# Altium PCB DS145-1.0-B溶解二氧化碳传感器.PcbDoc
Units mm, origin at the board's own origin, x right, y up, seen from the top; angles counter-clockwise.
Board outline 41 x 64 mm, 2 copper layers (Top Layer, Bottom Layer); 21 components, 28 nets, 82 pads, 84 vias.
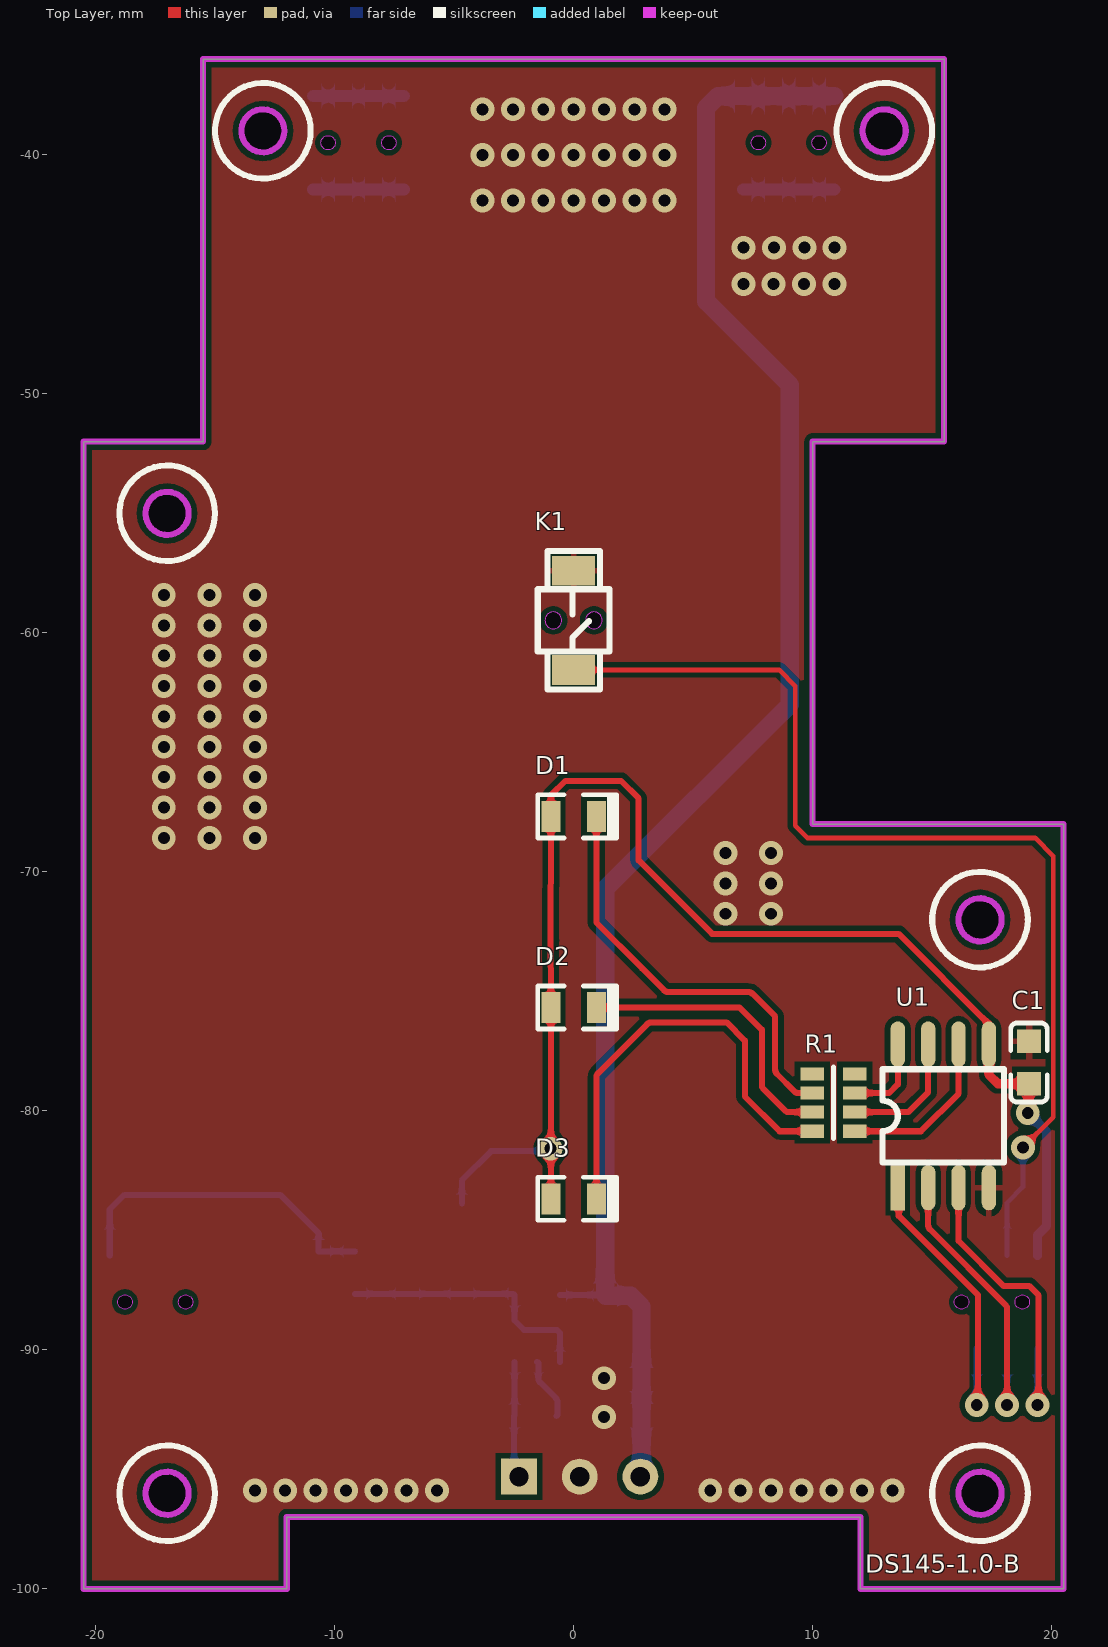
[diagram p0: Top Layer view]
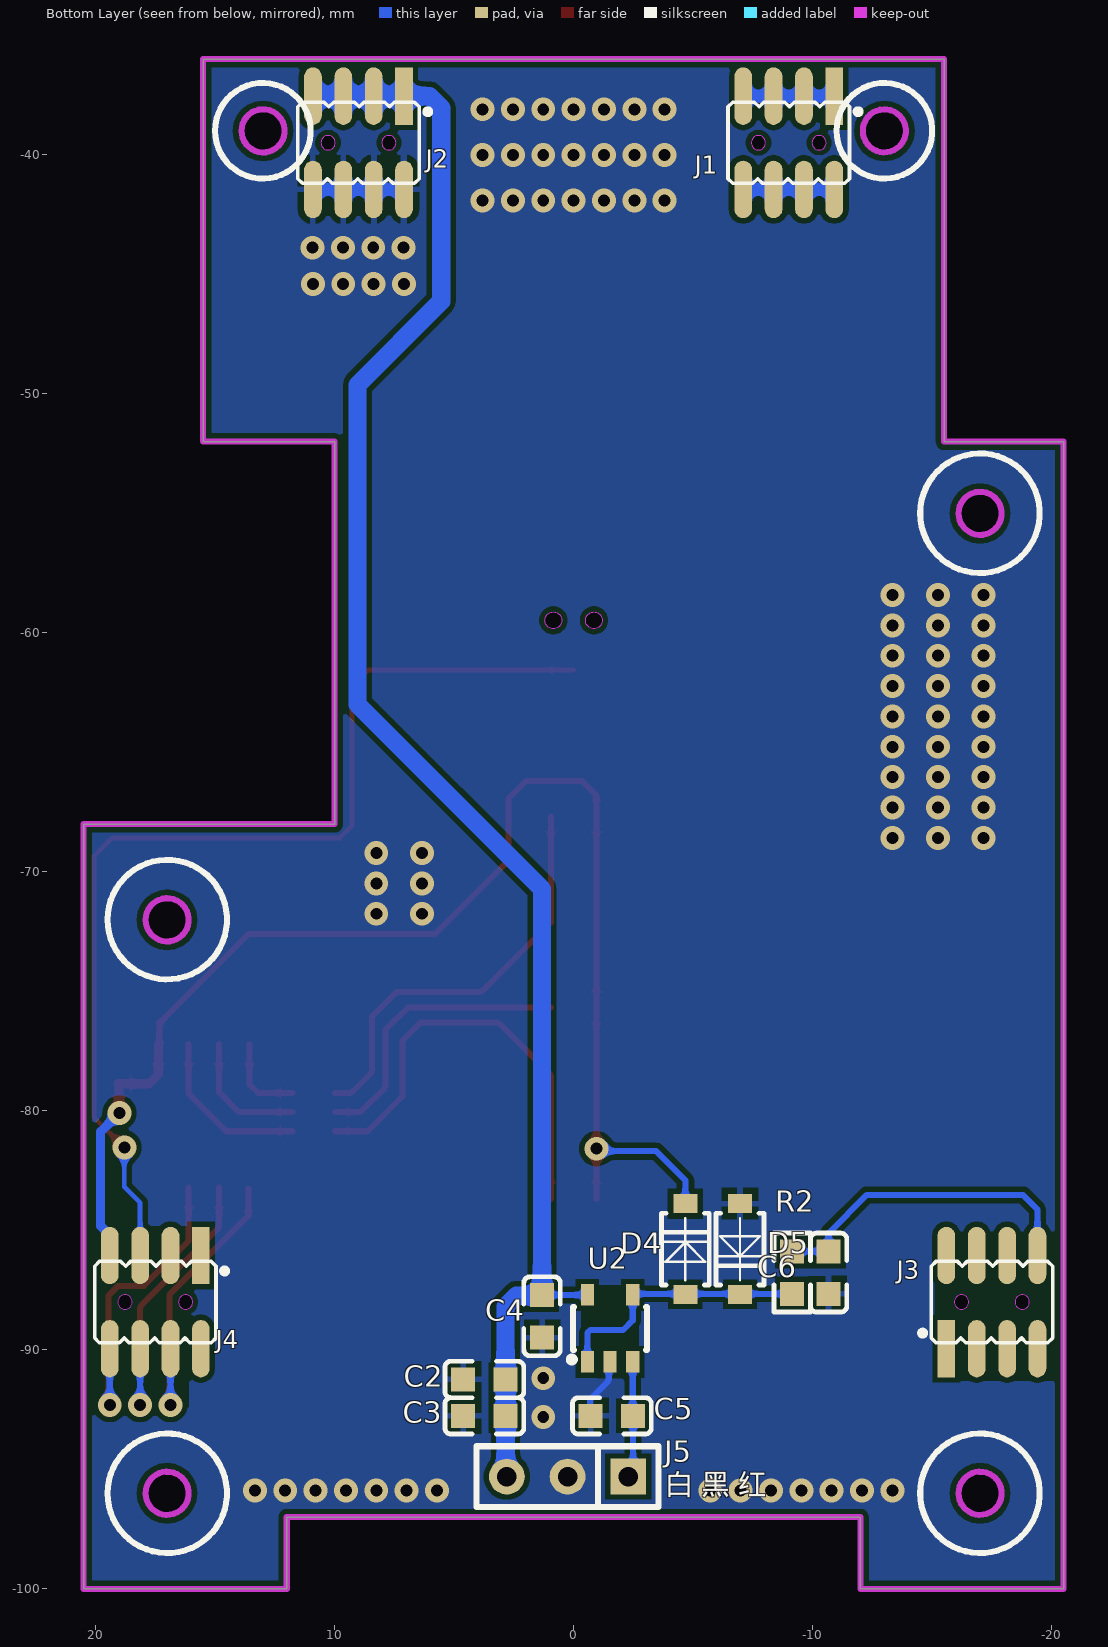
[diagram p1: Bottom Layer view, seen from below]
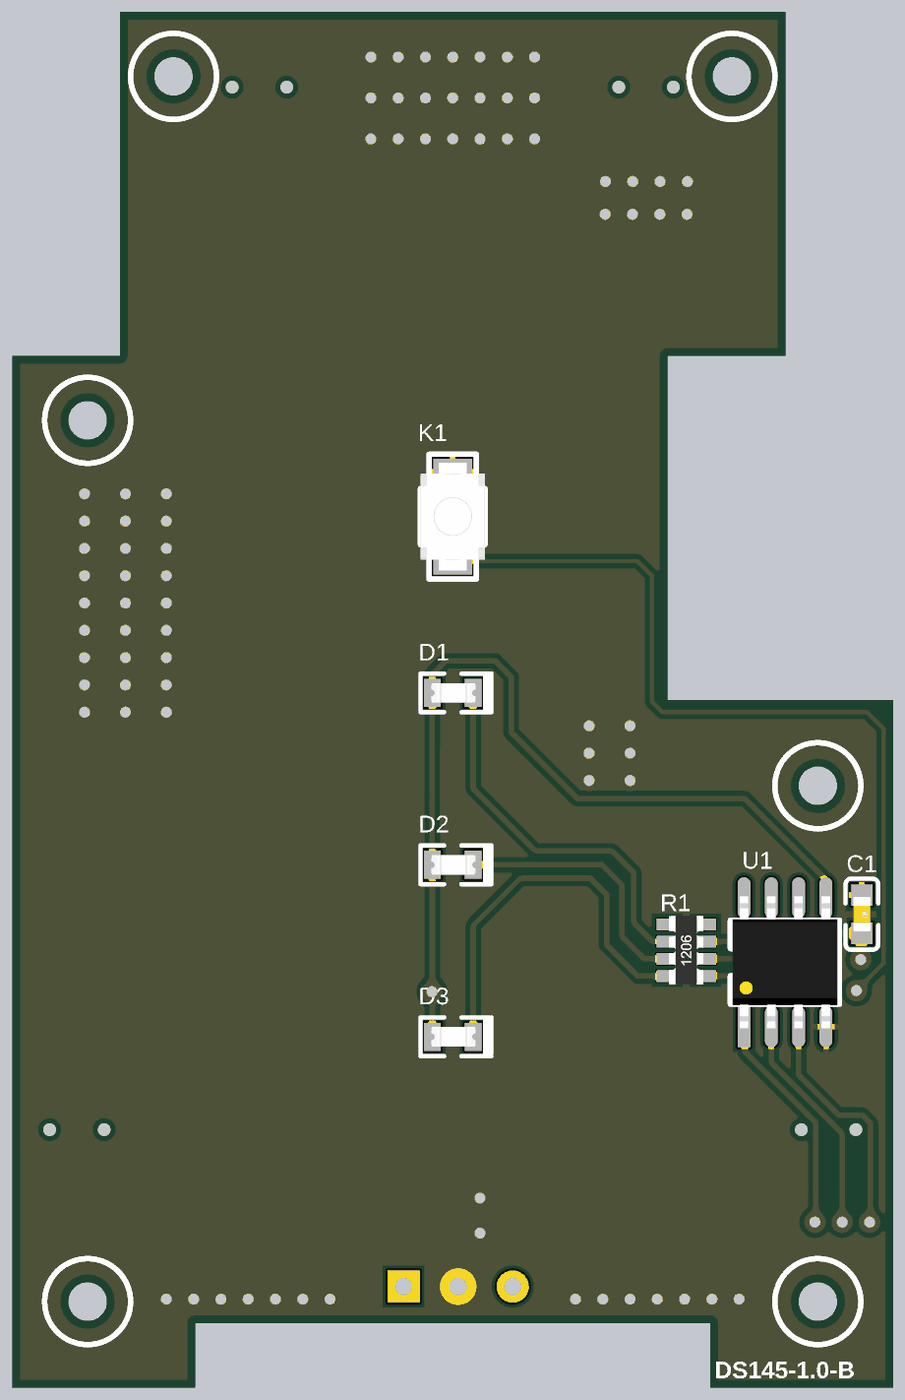
[diagram p2: 3D render of the assembled board from above, using the file's embedded part models]
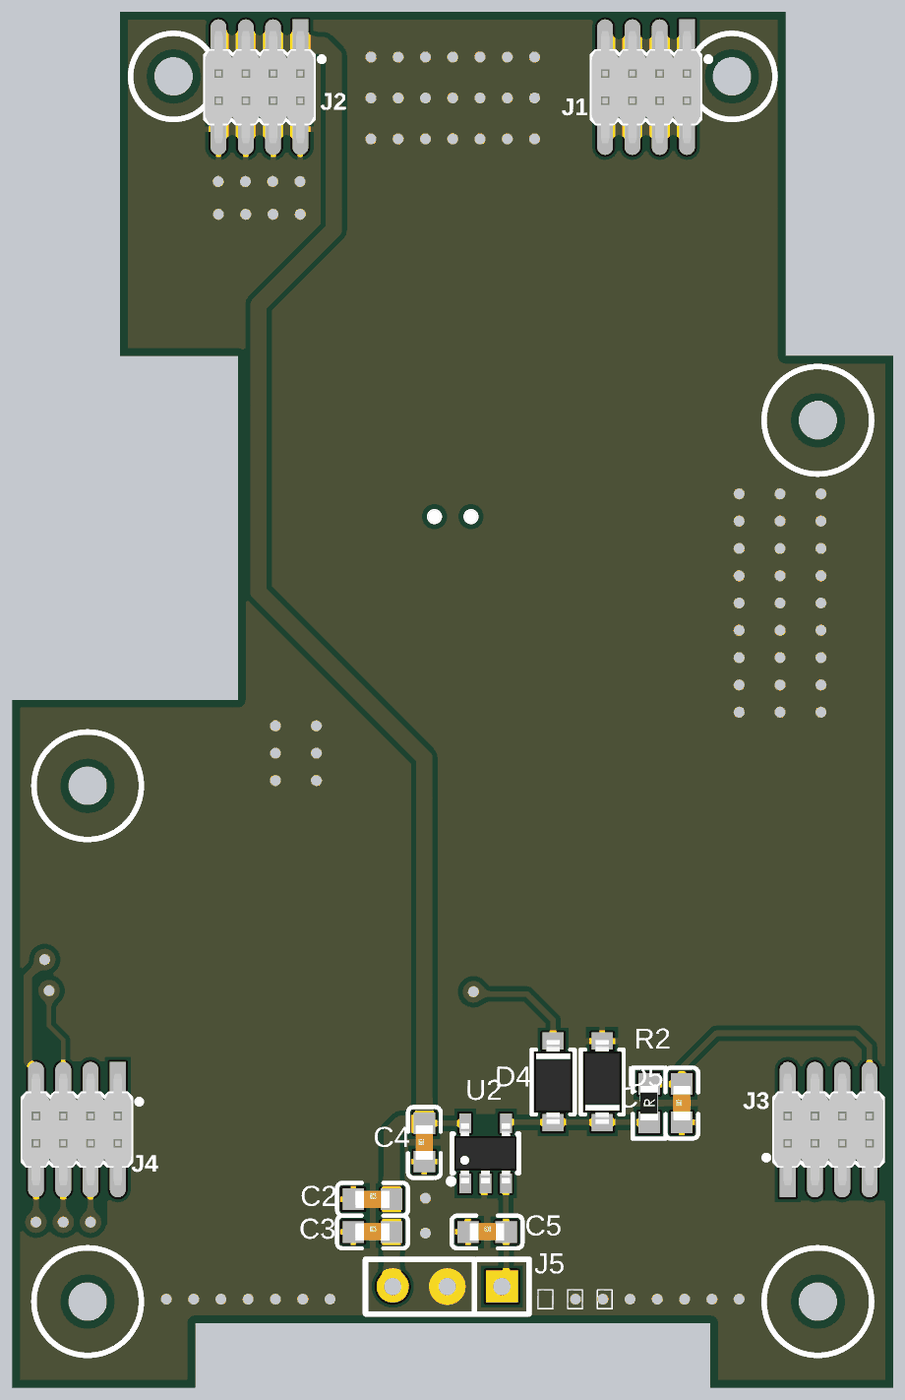
[diagram p3: 3D render of the assembled board from below, using the file's embedded part models]

## Layer stack, top to bottom
Top Solder: solder mask 0.0102, Solder Resist, Dk 3.5
Top Layer: signal copper 0.0356
Dielectric 1: dielectric 0.32, FR-4, Dk 4.8
Bottom Layer: signal copper 0.0356
Bottom Solder: solder mask 0.0102, Solder Resist, Dk 3.5

## Board outline
-20.5,-100 -20.5,-52 -15.5,-52 -15.5,-36 15.5,-36 15.5,-52 10,-52 10,-68 20.5,-68 20.5,-100 12,-100 12,-97 -12,-97 -12,-100
cut-out: -17.9,-96 ccw(c-17,-96) -17,-96.9 ccw(c-17,-96) -16.1,-96 ccw(c-17,-96) -17,-95.1 ccw(c-17,-96)
cut-out: 16.1,-96 ccw(c17,-96) 17,-96.9 ccw(c17,-96) 17.9,-96 ccw(c17,-96) 17,-95.1 ccw(c17,-96)
cut-out: 16.1,-72 ccw(c17,-72) 17,-72.9 ccw(c17,-72) 17.9,-72 ccw(c17,-72) 17,-71.1 ccw(c17,-72)
cut-out: -17.9,-55 ccw(c-17,-55) -17,-55.9 ccw(c-17,-55) -16.1,-55 ccw(c-17,-55) -17,-54.1 ccw(c-17,-55)
cut-out: 12.1,-39 ccw(c13,-39) 13,-39.9 ccw(c13,-39) 13.9,-39 ccw(c13,-39) 13,-38.1 ccw(c13,-39)
cut-out: -13.9,-39 ccw(c-13,-39) -13,-39.9 ccw(c-13,-39) -12.1,-39 ccw(c-13,-39) -13,-38.1 ccw(c-13,-39)
cut-out: -17.9,-96 ccw(c-17,-96) -17,-96.9 ccw(c-17,-96) -16.1,-96 ccw(c-17,-96) -17,-95.1 ccw(c-17,-96)
cut-out: 16.1,-96 ccw(c17,-96) 17,-96.9 ccw(c17,-96) 17.9,-96 ccw(c17,-96) 17,-95.1 ccw(c17,-96)
cut-out: 16.1,-72 ccw(c17,-72) 17,-72.9 ccw(c17,-72) 17.9,-72 ccw(c17,-72) 17,-71.1 ccw(c17,-72)
cut-out: -17.9,-55 ccw(c-17,-55) -17,-55.9 ccw(c-17,-55) -16.1,-55 ccw(c-17,-55) -17,-54.1 ccw(c-17,-55)
cut-out: 12.1,-39 ccw(c13,-39) 13,-39.9 ccw(c13,-39) 13.9,-39 ccw(c13,-39) 13,-38.1 ccw(c13,-39)
cut-out: -13.9,-39 ccw(c-13,-39) -13,-39.9 ccw(c-13,-39) -12.1,-39 ccw(c-13,-39) -13,-38.1 ccw(c-13,-39)

## Design rules (kind name [scope] priority, off if disabled: settings)
Clearance [All] p1: gap=0.152 ignorepadtopadclearanceinfootprint=TRUE except(0.229: Arc-Fill Arc-Poly Arc-Region Track-Fill Track-Poly Track-Region SMDPad-Fill SMDPad-Poly SMDPad-Region THPad-Fill THPad-Poly THPad-Region Via-Fill Via-Poly Via-Region Fill-Fill Fill-Poly Fill-Region Poly-Poly Poly-Region Region-Region)
PolygonConnect [All] p1: thpad.connectstyle=Relief thpad.reliefconductorwidth=0.254 thpad.reliefentries=4 thpad.polygonreliefangle="90 Angle" thpad.airgapwidth=0.254 smdpad.connectstyle=Relief smdpad.reliefconductorwidth=0.254 smdpad.reliefentries=4 smdpad.polygonreliefangle="90 Angle" smdpad.airgapwidth=0.254 via.connectstyle=Direct via.reliefconductorwidth=0.254 via.reliefentries=4 via.polygonreliefangle="90 Angle" via.airgapwidth=0.254
RoutingVias [All] p1: holewidth=0.406 width=0.813 viastyle="Through Hole" minholewidth=0.406 minwidth=0.813 maxholewidth=0.711 maxwidth=1.27
SolderMaskExpansion [All] p1: expansion=0.102 istentingtop=FALSE
Width [All] p1: maxlimit=0.762 minlimit=0.152 preferedwidth=0.254
30 further rules are at their usual default settings.

## Components (designator, comment, footprint, x,y, rotation, side; value= is the part's Value field where it differs from the comment)
C1 "SMDCAP00013" 0603CAP 19.05,-77.978 r270 top value=100nF
C2 "SMDCAP00016" 0603CAP 3.735,-91.237 r180 bottom value=10uF
C3 "SMDCAP00016" 0603CAP 3.735,-92.761 r180 bottom value=10uF
C4 "SMDCAP00013" 0603CAP 1.321,-88.595 r90 bottom value=100nF
C5 "SMDCAP00013" 0603CAP -1.599,-92.761 r180 bottom value=10nF
C6 "SMDCAP00013" 0603CAP -10.668,-86.766 r90 bottom value=100nF
D1 "SMDLED00010" LED_0805 0,-67.68 r0 top value=BLUE
D2 "SMDLED00003" LED_0805 0,-75.68 r0 top value=RED
D3 "Chip 翠绿LED 0805" LED_0805 0,-83.68 r0 top value=GREEN
D4 "DIPDIODE02001" SOD-123 -4.674,-85.781 r90 bottom value=1N4148
D5 "DIPDIODE02001" SOD-123 -6.96,-85.781 r270 bottom value=1N4148
J1 "X1321WVS-2x04J-C40D53" X1321WVS-2X04J-C40D53 -9,-39.5 r0 bottom locked value=2*4P
J2 "X1321WVS-2x04J-C40D53" X1321WVS-2X04J-C40D53 9,-39.5 r0 bottom locked value=2*4P
J3 "X1321WVS-2x04J-C40D53" X1321WVS-2X04J-C40D53 -17.5,-88 r180 bottom locked value=2*4P
J4 "X1321WVS-2x04J-C40D53" X1321WVS-2X04J-C40D53 17.5,-88 r0 bottom locked value=2*4P
J5 "SL000000042" SIP3 -2.286,-95.301 r0 bottom value=3P
K1 "TS-1185-B-A-A-A" KEY_TS-1185-x-A-A-A 0,-59.48 r270 top
R1 "SMDRES05003" 0603RES_Pack4 10.871,-79.654 r180 top value=510R
R2 "SMDRES00034" 0603RES -9.144,-86.766 r90 bottom value=1K
U1 "SMDIC000018" SO-8 15.469,-80.21 r90 top value=ULN2001
U2 "AD8605" SOT23-5 -1.524,-89.103 r180 bottom

## Footprints (in the part's own frame and the unit in brackets; to place one, negate y for a bottom-side part, rotate by r counter-clockwise, add the part's x,y. Pads: shape width x height; smd on the part's side, far side on the other; paste and mask are expansions set on the pad)
0603CAP [mm]
  rect 1x1 smd: 1(-0.889,0) 2(0.89,0)
  silkscreen extent -1.65,-0.76 1.65,0.76, body extent -0.8,-0.4 0.8,0.4, height 0.3
0603RES [mm]
  rect 1x1 smd: 1(-0.889,0) 2(0.889,0)
  silkscreen extent -1.65,-0.76 1.65,0.76, body extent -0.8,-0.41 0.8,0.41, height 0.51
0603RES_Pack4 [mm]
  rect 1x0.55 smd mask+0.05: 1(-0.889,1.2) 2(-0.889,0.4) 3(-0.889,-0.4) 4(-0.889,-1.2) 5(0.889,-1.2) 6(0.889,-0.4) 7(0.889,0.4) 8(0.889,1.2)
  silkscreen extent 0,-1.5 0,1.5, body extent -0.8,-1.6 0.8,1.6, height 0.5
KEY_TS-1185-x-A-A-A [mm]
  rect 1.25x1.8 smd: 1(-2.075,0) 2(2.075,0)
  Keep-Out Layer board cut-out: 0.35,-0.85 0.323,-0.716 0.247,-0.603 0.134,-0.527 0,-0.5 0,-0.5 -0.134,-0.527 -0.247,-0.603 -0.323,-0.716 -0.35,-0.85 -0.35,-0.85 -0.323,-0.984 -0.247,-1.097 -0.134,-1.173 0,-1.2 0,-1.2 0.134,-1.173 0.247,-1.097 0.323,-0.984 0.35,-0.85
  Keep-Out Layer board cut-out: -0.35,0.85 -0.323,0.716 -0.247,0.603 -0.134,0.527 0,0.5 0,0.5 0.134,0.527 0.247,0.603 0.323,0.716 0.35,0.85 0.35,0.85 0.323,0.984 0.247,1.097 0.134,1.173 0,1.2 0,1.2 -0.134,1.173 -0.247,1.097 -0.323,0.984 -0.35,0.85
  silkscreen extent -2.9,-1.5 2.9,1.5, body extent -2.5,-1.5 2.5,1.5, height 2
LED_0805 [mm]
  rect 0.8x1.3 smd: 1(-0.95,0) 2(0.95,0)
  silkscreen extent -1.5,-0.9 1.8,0.9, body extent -1,-0.45 1.06,0.45, height 0.85
SIP3 [mm]
  rect 1.5x1.5 hole 0.813: 1(0,0)
  round 1.5 hole 0.813: 2(2.54,0) 3(5.08,0)
  silkscreen extent -1.27,-1.27 6.35,1.27
SO-8 [mm]
  rect 1.9x0.6 smd: 1(-3,1.905)
  oval 1.9x0.6 smd: 2(-3,0.635) 3(-3,-0.635) 4(-3,-1.905) 5(3,-1.905) 6(3,-0.635) 7(3,0.635) 8(3,1.905)
  silkscreen extent -1.95,-2.54 1.95,2.54, body extent -3.07,-2.44 3.07,2.44, height 1.77
SOD-123 [mm]
  rect 0.8x1 smd: 1(-1.9,0) 2(1.9,0)
  silkscreen extent -1.5,-1 1.5,1, body extent -1.95,-0.9 1.95,0.9, height 1.18
SOT23-5 [mm] "SOT-23/SC-74A; 5 Leads; Body 3.1 x 3 mm, inc. leads (LxW max)"
  rect 0.55x0.9 smd: 1(-0.95,-1.4) 2(0,-1.4) 3(0.95,-1.4) 4(0.95,1.4) 5(-0.95,1.4)
  silkscreen extent -1.7,-1.4 1.55,0.9, body extent -1.45,-1.4 1.45,1.4, height 1.45
X1321WVS-2X04J-C40D53 [mm]
  rect 0.74x2.4 smd: 1(-1.905,-1.95)
  oval 0.74x2.4 smd: 2(-1.905,1.95) 3(-0.635,-1.95) 4(-0.635,1.95) 5(0.635,-1.95) 6(0.635,1.95) 7(1.905,-1.95) 8(1.905,1.95)
  Keep-Out Layer board cut-out: 1.57,0 1.547,0.115 1.482,0.212 1.385,0.277 1.27,0.3 1.27,0.3 1.155,0.277 1.058,0.212 0.993,0.115 0.97,0 0.97,0 0.993,-0.115 1.058,-0.212 1.155,-0.277 1.27,-0.3 1.27,-0.3 1.385,-0.277 1.482,-0.212 1.547,-0.115 1.57,0
  Keep-Out Layer board cut-out: -1.57,0 -1.547,-0.115 -1.482,-0.212 -1.385,-0.277 -1.27,-0.3 -1.27,-0.3 -1.155,-0.277 -1.058,-0.212 -0.993,-0.115 -0.97,0 -0.97,0 -0.993,0.115 -1.058,0.212 -1.155,0.277 -1.27,0.3 -1.27,0.3 -1.385,0.277 -1.482,0.212 -1.547,0.115 -1.57,0
  silkscreen extent -3,-1.7 2.54,1.7, body extent -2.54,-2.6 2.54,2.6, height 5.5

## Part data
C1 C4 C5 C6: library part "MLCC 100nF 50V ±10％ 0603", "贴片电容"
C2 C3: library part "MLCC 10uF 50V ±10％ 0603", "贴片电容"
D1: library part "Chip 蓝色LED 0805", "贴片LED"
D2: library part "Chip 红色LED 0805", "贴片LED"
D3: "贴片LED"
D4 D5: library part 1N4148W, "贴片开关二极管 T4"
J1 J2 J3 J4: "双排针2x4P 立贴 1.27mm"
J5: library part "DIP3 单排直针 间距2.54mm 针长11mm 铜", "单排直针"
K1: "轻触开关"
R1: library part "Chip R*4 510R 1/16W ±5％ 0603", "贴片排阻"
R2: library part "Chip 1K 1/16W ±1％ 0603", "贴片电阻"
U1: library part "ULN2001 SOP-8", "电机驱动芯片"
U2: library part "AD8605 SOT23-5", "运放芯片"

## Via types
v1: diameter 1, hole 0.5, Top Layer to Bottom Layer, tented both sides, 84 vias

## Nets (pads, with @x,y where several pads share a name; then routed paths per layer and width w, separated by ;. In a path a pad name is that pad's centre, name@x,y a point inside that pad or via, vN(x,y) a via of type N, cw(c..) or ccw(c..) an arc to the next point about the centre after c; other vN are vias at no path point)
ADC0: C6.2 J3.8 R2.2 | length 13.9
  Bottom Layer w0.254: J3.8 -19.405,-84.124 -18.796,-83.515 -12.268,-83.515 -10.668,-85.115 C6.2 -9.145,-85.876 R2.2
ADC1: J4.2
DAC_OUT: J3.6
Dis_blue_EN: J4.4 U1.1 | length 12.8
  Top Layer w0.254: U1.1@13.603,-83.25 13.603,-84.393 16.911,-87.701 16.911,-92.257 v1(16.865,-92.303)
  Bottom Layer w0.254: v1(16.865,-92.303) J4.4
Dis_green_EN: J4.8 U1.3 | length 13.5
  Top Layer w0.254: U1.3 16.104,-85.446 17.977,-87.319 19.052,-87.319 19.451,-87.718 19.451,-92.257 v1(19.405,-92.303)
  Bottom Layer w0.254: v1(19.405,-92.303) J4.8
Dis_red_EN: J4.6 U1.2 | length 12.8
  Top Layer w0.254: U1.2 14.834,-84.782 ccw(c15.088,-84.782) 14.908,-84.961 18.061,-88.114 cw(c17.881,-88.293) 18.135,-88.293 v1(18.135,-92.303)
  Bottom Layer w0.254: v1(18.135,-92.303) J4.6
GND: C1.1 C2.1 C3.1 C4.1 C5.1 C6.1 D5.1 J2.2 J2.4 J2.6 J2.8 J5.2 K1.1 U1.4 U2.2 | length 6.4
  Bottom Layer w0.254: U2.2 -1.473,-90.554 -1.473,-91.182 ccw(c-1.219,-91.182) -1.399,-91.362 -0.75,-92.01 cw(c-0.93,-92.19) -0.676,-92.19 -0.676,-92.727 C5.1
  Bottom Layer w0.508: J2.2 J2.4 J2.6 J2.8
  other v1: -13.335,-95.885 -12.065,-95.885 -10.795,-95.885 -9.525,-95.885 -8.255,-95.885 -6.985,-95.885 -5.715,-95.885 5.715,-95.885 6.985,-95.885 8.255,-95.885 9.525,-95.885 10.795,-95.885 12.065,-95.885 13.335,-95.885 1.27,-92.812 1.27,-91.186 6.35,-71.755 8.255,-71.755 6.35,-70.485 8.255,-70.485 6.35,-69.215 8.255,-69.215 -17.145,-68.58 -15.24,-68.58 -13.335,-68.58 -17.145,-67.31 -15.24,-67.31 -13.335,-67.31 -17.145,-66.04 -15.24,-66.04 -13.335,-66.04 -17.145,-64.77 -15.24,-64.77 -13.335,-64.77 -17.145,-63.5 -15.24,-63.5 -13.335,-63.5 -17.145,-62.23 -15.24,-62.23 -13.335,-62.23 -17.145,-60.96 -15.24,-60.96 -13.335,-60.96 -17.145,-59.69 -15.24,-59.69 -13.335,-59.69 -17.145,-58.42 -15.24,-58.42 -13.335,-58.42 7.099,-45.414 8.369,-45.414 9.639,-45.414 10.909,-45.414 7.112,-43.891 8.382,-43.891 9.652,-43.891 10.922,-43.891 -3.81,-41.91 -2.54,-41.91 -1.27,-41.91 0,-41.91 1.27,-41.91 2.54,-41.91 3.81,-41.91 -3.81,-40.005 -2.54,-40.005 -1.27,-40.005 0,-40.005 1.27,-40.005 2.54,-40.005 3.81,-40.005 -3.81,-38.1 -2.54,-38.1 -1.27,-38.1 0,-38.1 1.27,-38.1 2.54,-38.1 3.81,-38.1
I2C1_SCL: J4.1
I2C1_SDA: J4.3
KEY_HOME: J4.5 K1.2 | length 44.2
  Top Layer w0.2: K1.2 8.596,-61.555 9.271,-62.23 9.271,-68.072 9.779,-68.58 19.304,-68.58 20.066,-69.342 20.066,-80.264 v1(18.796,-81.534)
  Bottom Layer w0.2: J4.5 18.135,-83.846 18.796,-83.185 v1(18.796,-81.534)
LED_blue: D1.2 R1.6 | length 17.8
  Top Layer w0.254: D1.2 0.95,-72.121 2.87,-74.041 3.786,-74.957 ccw(c3.966,-74.778) 3.966,-75.032 7.312,-75.032 cw(c7.312,-75.286) 7.491,-75.106 8.433,-76.048 8.433,-78.279 ccw(c8.687,-78.279) 8.507,-78.459 9.229,-79.181 ccw(c9.408,-79) 9.407,-79.254 R1.6
LED_green: D3.2 R1.8 | length 18.4
  Top Layer w0.254: D3.2 0.95,-78.605 cw(c1.204,-78.606) 1.023,-78.428 3.076,-76.376 cw(c3.255,-76.556) 3.255,-76.302 6.401,-76.302 7.163,-77.064 7.163,-79.4 8.617,-80.854 R1.8
LED_red: D2.2 R1.7 | length 12.2
  Top Layer w0.254: D2.2 6.948,-75.68 7.874,-76.606 7.874,-78.914 ccw(c8.128,-78.914) 7.948,-79.094 8.835,-79.981 ccw(c9.014,-79.8) 9.013,-80.054 R1.7
NetC5_2: C5.2 J5.1 U2.3 | length 4.9
  Bottom Layer w0.254: U2.3 -2.474,-92.746 C5.2 -2.489,-95.098 J5.1
NetD4_1: D4.1 D5.2 R2.1 U2.1 U2.4 | length 11.1
  Bottom Layer w0.254: R2.1 -2.522,-87.655 U2.4 -2.474,-88.763 -2.069,-89.168 -0.697,-89.168 -0.574,-89.291 U2.1
NetR1_1: R1.1 U1.6 | length 7.1
  Top Layer w0.254: R1.1 14.529,-80.854 16.104,-79.28 U1.6
NetR1_2: R1.2 U1.7 | length 5.4
  Top Layer w0.254: R1.2 14.002,-80.054 14.834,-79.223 U1.7
NetR1_3: R1.3 U1.8 | length 3.6
  Top Layer w0.254: R1.3 13.202,-79.254 13.564,-78.892 U1.8
SPI2_CS: J3.4
SPI2_MISO: J3.1
SPI2_MOSI: J3.3
SPI2_SCK: J3.2
USART2_RXD: J3.5
USART2_TXD: J3.7
VBUS: J1.2 J1.4 J1.6 J1.8 | length 3.8
  Bottom Layer w0.508: J1.2 J1.4 J1.6 J1.8
VCC_3V3_MCU: C1.2 D1.1 D2.1 D3.1 D4.2 J4.7 U1.5 | length 58.1
  Top Layer w0.254: -0.965,-72.848 -0.953,-75.157 D2.1 D3.1 ; -0.965,-72.847 -0.952,-68.203 D1.1 -0.95,-66.802 -0.34,-66.192 1.981,-66.192 2.718,-66.929 2.718,-69.52 5.796,-72.598 13.594,-72.598 17.332,-76.336 U1.5@17.332,-77.168
  Top Layer w0.381: U1.5@17.332,-77.168 U1.5 17.374,-78.486 17.756,-78.868 C1.2 19.025,-78.893 19.025,-80.061 v1(18.999,-80.086)
  Bottom Layer w0.254: D4.2 -4.674,-82.908 -3.454,-81.689 -1.069,-81.689 v1(-0.965,-81.585)
  Bottom Layer w0.381: v1(18.999,-80.086) 19.787,-80.874 19.787,-84.817 19.405,-85.199 J4.7
VCC_5V: C2.2 C3.2 C4.2 J2.1 J2.3 J2.5 J2.7 J5.3 U2.5 | length 70.6
  Bottom Layer w0.254: U2.5 C4.2@1.319,-87.703
  Bottom Layer w0.508: C4.2@1.319,-87.703 C4.2
  Bottom Layer w0.762: J5.3 2.845,-95.25 C3.2 C2.2 2.845,-88.189 2.387,-87.731 1.347,-87.731 C4.2 1.321,-70.714 9.042,-62.992 9.042,-49.632 5.537,-46.126 5.537,-38.049 6.036,-37.55 J2.1 J2.3 J2.5 J2.7
VSS: J1.1 J1.3 J1.5 J1.7 | length 3.8
  Bottom Layer w0.508: J1.1 J1.3 J1.5 J1.7
pads on no net: R1.4 R1.5

## Polygon pours and split planes (outlines as drawn)
GND on Top Layer "GND_L01_P001" (solid, remove dead copper, pour order 1): -20.5,-100 -20.5,-52 -15.5,-52 -15.5,-36 15.5,-36 15.5,-52 10,-52 10,-68 20.5,-68 20.5,-100 12,-100 12,-97 -12,-97 -12,-100
GND on Bottom Layer "GND_L02_P002" (solid, remove dead copper, pour order 2): -20.5,-100 -20.5,-52 -15.5,-52 -15.5,-36 15.5,-36 15.5,-52 10,-52 10,-68 20.5,-68 20.5,-100 12,-100 12,-97 -12,-97 -12,-100

## Keep-outs
Keep-Out Layer:
  circle w0.254: c-13,-39 r0.9
  circle w0.254: c-17.005,-95.999 r0.903
  circle w0.254: c17.005,-95.999 r0.903
  circle w0.254: c12.992,-39.002 r0.903
  circle w0.254: c17.005,-72.009 r0.903
  circle w0.254: c-17.005,-55.004 r0.903
  lines w0.254: -20.5,-100 -12,-100 -12,-97 12,-97 12,-100 20.5,-100 20.5,-68 10,-68 10,-52 15.5,-52 15.5,-36 -15.5,-36 -15.5,-52 -20.5,-52 -20.5,-100

## Other copper
Bottom Layer:
  pour cut-out: -2.743,-87.274 -2.743,-90.932 -0.305,-90.932 -0.305,-87.274
  pour cut-out: 16.087,-85.302 16.087,-84.811 16.744,-84.811 20.015,-84.811 20.015,-92.604 16.306,-92.604 16.087,-92.385
  pour cut-out: -15.103,-85.016 -15.126,-85.039 -20.117,-85.039 -20.117,-91.262 -20.077,-91.302 -15.073,-91.302

## Silkscreen, mask and mechanical layers (free items; w line width, h text height)
Top Overlay:
  circle w0.254: c-17,-96 r2
  circle w0.254: c17,-96 r2
  circle w0.254: c17,-72 r2
  circle w0.254: c-17,-55 r2
  circle w0.254: c-13,-39 r2
  circle w0.254: c13,-39 r2
  text "DS145-1.0-B" at 12.192,-99.568 h1.27
Bottom Overlay:
  circle w0.254: c-17,-96 r2.5
  circle w0.254: c17,-96 r2.5
  circle w0.254: c17,-72 r2.5
  circle w0.254: c-17,-55 r2.5
  circle w0.254: c-13,-39 r2
  circle w0.254: c13,-39 r2
  text "白 黑 红" at -3.811,-96.352 h1.52
Mechanical 1:
  circle w0.254: c17,-72 r0.9
  circle w0.254: c-13,-39 r0.9
  circle w0.254: c13,-39 r0.9
  circle w0.254: c-17,-55 r0.9
  circle w0.254: c17,-96 r0.9
  circle w0.254: c-17,-96 r0.9
  lines w0.254: -20.5,-100 -12,-100 -12,-97 12,-97 12,-100 20.5,-100 20.5,-68 10,-68 10,-52 15.5,-52 15.5,-36 -15.5,-36 -15.5,-52 -20.5,-52 -20.5,-100
Mechanical 15:
  lines w0.15: -4.485,-36 -4.485,-44.41 4.485,-44.41 4.485,-36
  lines w0.508: -16,-51 16,-51